# Altium PCB Slider.PcbDoc
Units mm, origin at the board's own origin, x right, y up, seen from the top; angles counter-clockwise.
Board outline 50.99 x 50.99 mm, 2 copper layers (Top Layer, Bottom Layer); 17 components, 16 nets, 32 pads, 0 vias.
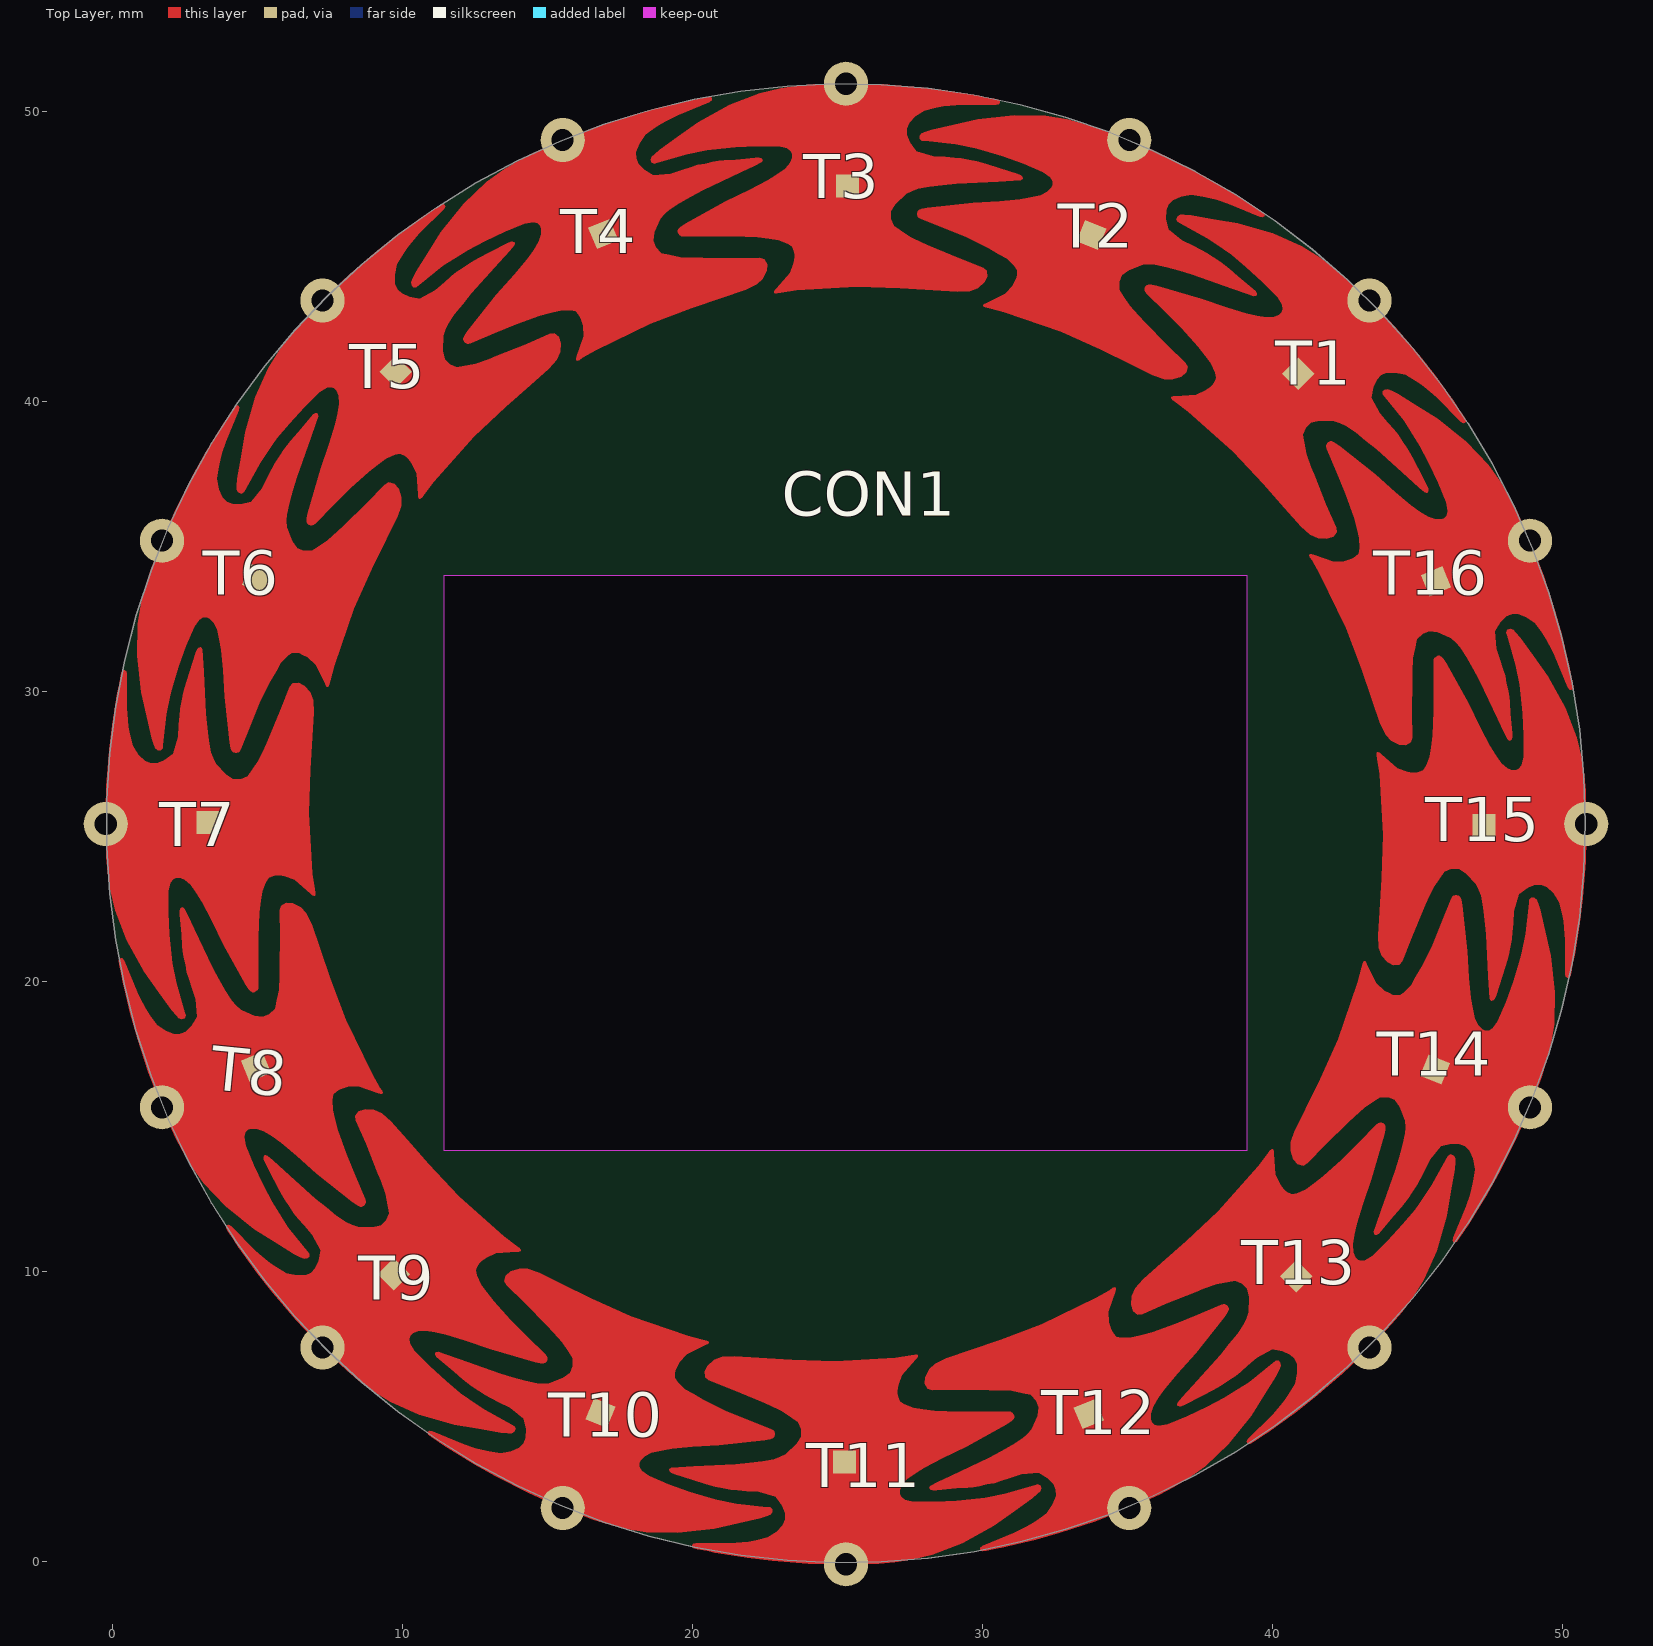
[diagram p0: Top Layer view]
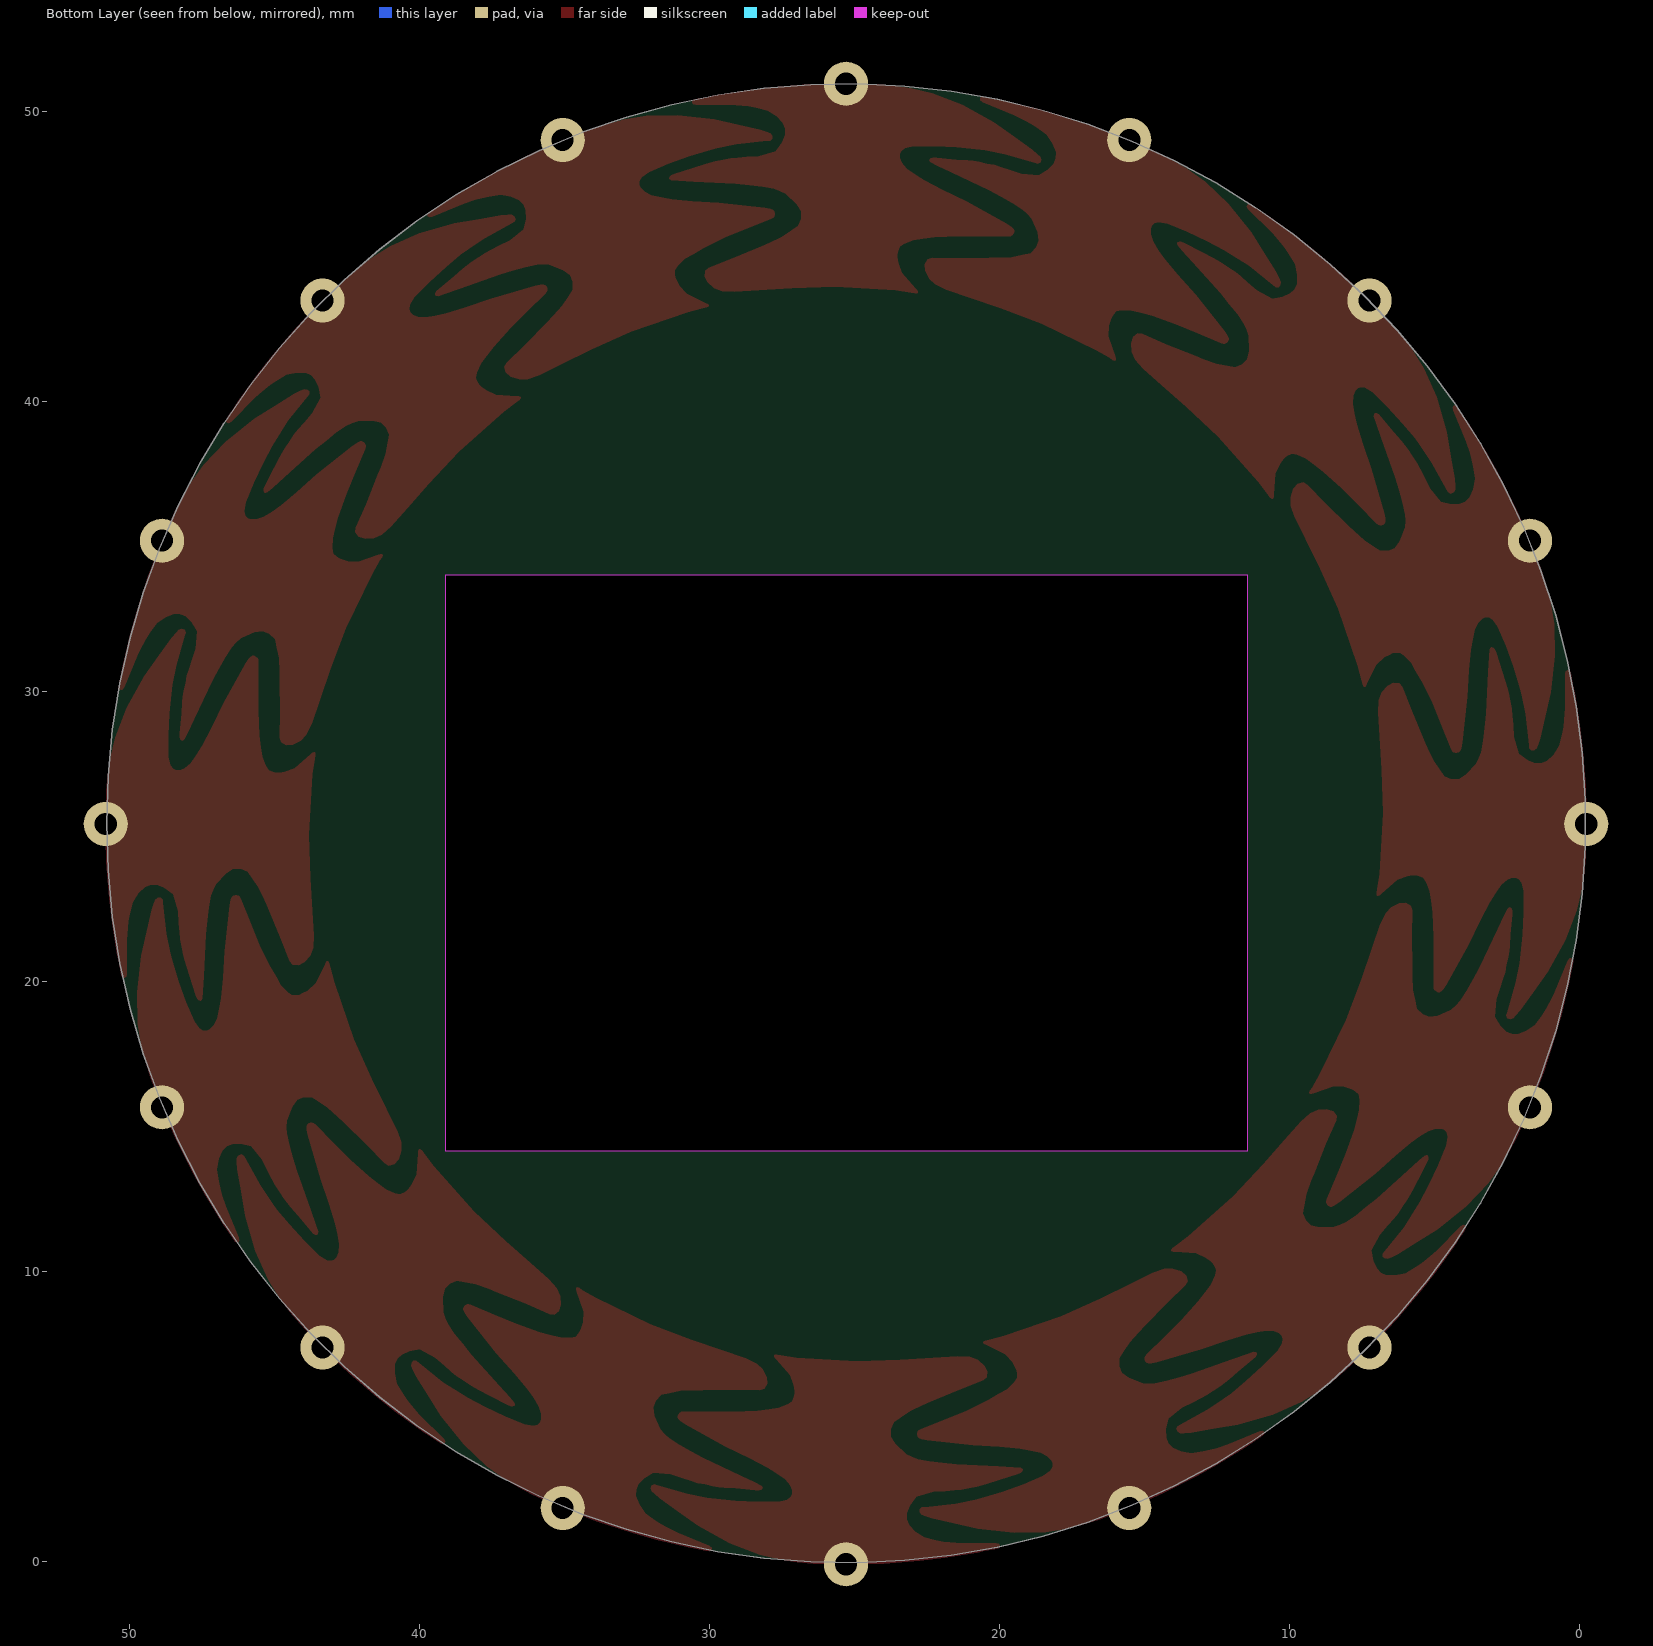
[diagram p1: Bottom Layer view, seen from below]

## Layer stack, top to bottom
Top Solder: solder mask 0.0102, Solder Resist, Dk 3.5
Top Layer: signal copper 0.0356
Dielectric 1: dielectric 0.32, FR-4, Dk 4.8
Bottom Layer: signal copper 0.0356
Bottom Solder: solder mask 0.0102, Solder Resist, Dk 3.5

## Board outline
50.799,25.45 50.748,27.067 50.594,28.678 50.338,30.276 49.982,31.854 49.526,33.407 48.972,34.927 48.324,36.409 47.582,37.848 46.751,39.236 45.833,40.569 44.833,41.841 43.754,43.047 42.601,44.182 41.378,45.241 40.09,46.221 38.743,47.118 37.342,47.927 35.892,48.645 34.4,49.27 32.87,49.8 31.311,50.231 29.727,50.562 28.125,50.793 26.512,50.921 24.894,50.946 23.278,50.869 21.67,50.69 20.076,50.409 18.504,50.028 16.959,49.547 15.447,48.97 13.975,48.298 12.549,47.533 11.174,46.68 9.856,45.742 8.6,44.721 7.411,43.623 6.295,42.452 5.255,41.213 4.295,39.91 3.42,38.548 2.634,37.134 1.938,35.673 1.337,34.171 0.832,32.634 0.425,31.068 0.119,29.479 -0.086,27.874 -0.188,26.259 -0.188,24.641 -0.086,23.026 0.119,21.421 0.425,19.832 0.832,18.265 1.337,16.728 1.938,15.226 2.634,13.765 3.42,12.351 4.295,10.99 5.255,9.687 6.295,8.447 7.411,7.276 8.6,6.178 9.856,5.158 11.174,4.219 12.549,3.366 13.975,2.602 15.447,1.93 16.959,1.352 18.504,0.872 20.076,0.49 21.67,0.209 23.278,0.03 24.894,-0.047 26.512,-0.021 28.125,0.107 29.727,0.337 31.311,0.668 32.87,1.1 34.4,1.629 35.892,2.254 37.342,2.973 38.743,3.782 40.09,4.678 41.378,5.658 42.601,6.718 43.754,7.853 44.833,9.059 45.833,10.331 46.751,11.663 47.582,13.052 48.324,14.49 48.972,15.972 49.526,17.493 49.982,19.045 50.338,20.624 50.594,22.222 50.748,23.832
cut-out: 11.45,14.15 11.45,34 39.125,34 39.125,14.15

## Design rules (kind name [scope] priority, off if disabled: settings)
Clearance [All] p1: gap=0.12
PolygonConnect [All] p1: connectstyle=Relief reliefconductorwidth=0.254 reliefentries=4 polygonreliefangle="90 Angle" airgapwidth=0.254
RoutingVias [All] p1: holewidth=0.711 width=1.27 viastyle="Through Hole" minholewidth=0.711 minwidth=1.27 maxholewidth=0.711 maxwidth=1.27
SolderMaskExpansion [All] p1: expansion=0.102
Width [All] p1: maxlimit=0.254 minlimit=0.254 preferedwidth=0.254
29 further rules are at their usual default settings.

## Classes and differential pairs
component class Slider: T1 T2 T3 T4 T5 T6 T7 T8 T9 T10 T11 T12 T13 T14 T15 T16

## Components (designator, comment, footprint, x,y, rotation, side; value= is the part's Value field where it differs from the comment)
CON1 "RoundSensorCon" RoundSensorCon 25.3,25.425 r0 top
T1 "Touch" TOUCH 25.3,25.425 r315 top
T2 "Touch" TOUCH 25.3,25.425 r337.5 top
T3 "Touch" TOUCH 25.3,25.425 r0 top
T4 "Touch" TOUCH 25.3,25.425 r22.5 top
T5 "Touch" TOUCH 25.3,25.425 r45 top
T6 "Touch" TOUCH 25.3,25.425 r67.5 top
T7 "Touch" TOUCH 25.3,25.425 r90 top
T8 "Touch" TOUCH 25.3,25.425 r112.5 top
T9 "Touch" TOUCH 25.3,25.425 r135 top
T10 "Touch" TOUCH 25.3,25.425 r157.5 top
T11 "Touch" TOUCH 25.3,25.425 r180 top
T12 "Touch" TOUCH 25.3,25.425 r202.5 top
T13 "Touch" TOUCH 25.3,25.425 r225 top
T14 "Touch" TOUCH 25.3,25.425 r247.5 top
T15 "Touch" TOUCH 25.3,25.425 r270 top
T16 "Touch" TOUCH 25.3,25.425 r292.5 top

## Footprints (in the part's own frame and the unit in brackets; to place one, negate y for a bottom-side part, rotate by r counter-clockwise, add the part's x,y. Pads: shape width x height; smd on the part's side, far side on the other; paste and mask are expansions set on the pad)
RoundSensorCon [mil]
  round 60 hole 30: 1(710.64,710.64) 2(384.6,928.5) 3(0,1005) 4(-384.6,928.5) 5(-710.64,710.64) 6(-928.5,384.6) 7(-1005,0) 8(-928.5,-384.6) 9(-710.64,-710.64) 10(-384.6,-928.5) 11(0,-1005) 12(384.6,-928.5) 13(710.64,-710.64) 14(928.5,-384.6) 15(1005,0) 16(928.5,384.6)
  Top Layer lines w0.39: -384.6,928.5 -368.99,922.03
TOUCH [mm]
  rect 0.8x0.8 smd paste+0 mask+0: 1(0.05,22)
  Top Layer region: -2.25,25.375 -1.675,25.45 -1.125,25.5 -0.225,25.525 0.5,25.525 1.3,25.5 2.55,25.4 3.4,25.3 4.075,25.2 4.525,25.125 4.79,25.066 5.125,25 5.25,24.975 5.3,24.925 5.3,24.875 5.275,24.825 5.175,24.8 4,24.8 3.575,24.775 3.35,24.75 3.1,24.7 2.7,24.6 2.386,24.4 2.175,24.175 2.1,23.975 2.1,23.775 2.2,23.5 2.425,23.2 3,23.025 3.425,23 3.725,22.975 3.975,22.95 4.225,22.9 4.5,22.85 4.7,22.8 4.875,22.75 5.25,22.625 5.9,22.425 6.025,22.375 6.075,22.325 6.1,22.275 6.1,22.25 6.075,22.225 6.025,22.2 5.775,22.175 5.25,22.15 3.8,22.075 3.325,22.025 2.875,21.975 2.475,21.9 2.275,21.825 2.075,21.725 1.7,21.375 1.55,21.125 1.55,20.875 1.65,20.625 1.875,20.475 2.2,20.25 2.625,20.05 2.9,19.925 3.9,19.5 4.725,19.175 4.85,19.075 4.875,18.875 4.775,18.675 4.55,18.475 4.275,18.375 3.85,18.35 3,18.4 1.875,18.475 0.37,18.522 -1.711,18.4 -2.25,18.325 -2.375,18.3 -2.45,18.3 -2.475,18.325 -2.475,18.35 -2.45,18.4 -2.4,18.45 -1.925,19 -1.8,19.35 -1.775,19.55 -1.775,19.65 -1.8,19.775 -1.85,19.9 -2,20 -2.325,20.125 -2.65,20.175 -3.05,20.225 -3.9,20.275 -4.725,20.275 -5.606,20.262 -5.675,20.275 -5.725,20.3 -5.775,20.35 -5.8,20.4 -5.8,20.475 -5.775,20.525 -5.7,20.6 -5.55,20.7 -4.15,21.475 -3.325,21.875 -2.7,22.2 -2.375,22.4 -2.1,22.6 -1.925,22.8 -1.85,22.975 -1.85,23.1 -1.9,23.2 -2.025,23.3 -2.321,23.372 -3.05,23.375 -3.821,23.334 -4.475,23.275 -4.8,23.225 -5.475,23.1 -6.5,22.8 -6.6,22.775 -6.7,22.8 -6.725,22.9 -6.7,23 -6.6,23.1 -6.425,23.25 -5.8,23.7 -5.1,24.2 -4,24.8 -2.975,25.2

## Nets (pads, with @x,y where several pads share a name; then routed paths per layer and width w, separated by ;. In a path a pad name is that pad's centre, name@x,y a point inside that pad or via, vN(x,y) a via of type N, cw(c..) or ccw(c..) an arc to the next point about the centre after c; other vN are vias at no path point)
NetCON1_1: CON1.1 T1.1
NetCON1_2: CON1.2 T2.1
NetCON1_3: CON1.3 T3.1
NetCON1_4: CON1.4 T4.1
NetCON1_5: CON1.5 T5.1
NetCON1_6: CON1.6 T6.1
NetCON1_7: CON1.7 T7.1
NetCON1_8: CON1.8 T8.1
NetCON1_9: CON1.9 T9.1
NetCON1_10: CON1.10 T10.1
NetCON1_11: CON1.11 T11.1
NetCON1_12: CON1.12 T12.1
NetCON1_13: CON1.13 T13.1
NetCON1_14: CON1.14 T14.1
NetCON1_15: CON1.15 T15.1
NetCON1_16: CON1.16 T16.1